# Altium PCB PcbForControlBoard.PcbDoc (part 2 of 2)
Units mm, origin at the board's own origin, x right, y up, seen from the top; angles counter-clockwise.
Board outline 90 x 35 mm, 4 copper layers (Top Layer, MID1, MID2, Bottom Layer), stack 0.603 mm thick; 169 components, 143 nets, 686 pads, 29 vias.
Unrouted connection lines stored in the file: 418.
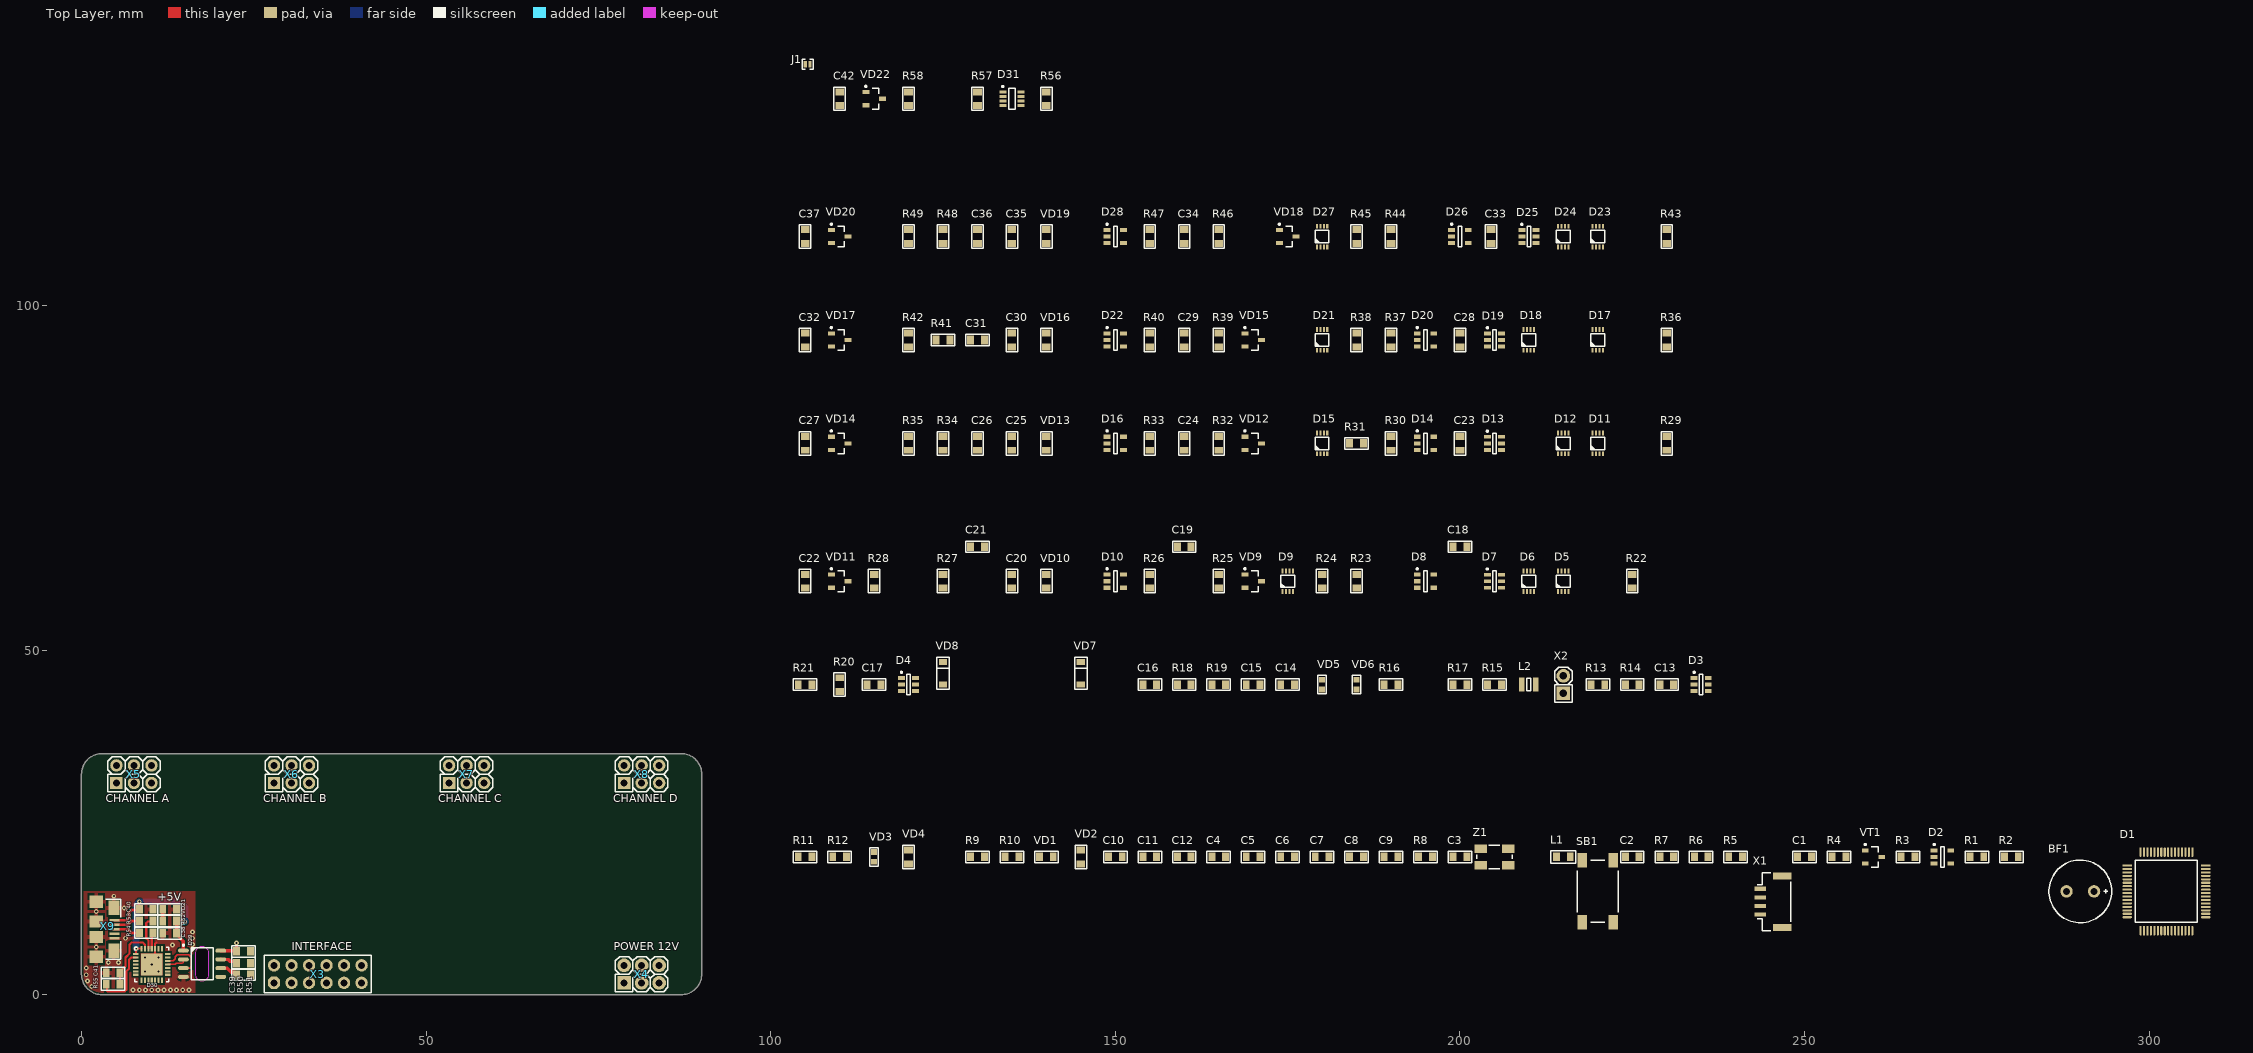
[diagram p0: Top Layer view]

## Via types
v1: diameter 0.7, hole 0.3, Top Layer to Bottom Layer, tented both sides, 29 vias

## Nets (pads, with @x,y where several pads share a name; then routed paths per layer and width w, separated by ;. In a path a pad name is that pad's centre, name@x,y a point inside that pad or via, vN(x,y) a via of type N, cw(c..) or ccw(c..) an arc to the next point about the centre after c; other vN are vias at no path point) (continued)
NetD30_9: (continued)
  Top Layer w0.3: R55.1 3.6,1.375 3.7,1.275 3.7,0.6 3.85,0.45 6.25,0.45 6.5,0.7 6.5,3.4 6.9,3.8 6.9,5.1 7.2,5.4 D30.9
NetD31_1: D31.1 R56.2
NetD31_4: D31.4 R57.2
NetD31_5: D31.5 D31.8 J1.1
NetR3_1: R3.1 R4.1 VT1.1
NetR5_2: R5.2 R7.1 SB1.2
NetR9_1: R9.1 VD1.1
NetR10_1: R10.1 VD2.1
NetR11_1: R11.1 VD3.1
NetR12_1: R12.1 VD4.1
NetR13_2: R13.2 VD5.1
NetR14_1: R14.1 VD6.1
NetR17_2: R17.2 R19.2 X2.2
NetR26_1: R26.1 VD10.1
NetR33_1: R33.1 VD13.1
NetR40_1: R40.1 VD16.1
NetR47_1: R47.1 VD19.1
NetR52_1: R52.1 VD21.1 | length 1.7
  Top Layer w0.5: R52.1 VD21.1
NetR53_1: R53.1 X9.2 | length 3.8
  Top Layer w0.4: X9.2 6.75,10.15 7.3,10.7 R53.1
NetR54_1: R54.1 X9.3 | length 3.8
  Top Layer w0.4: X9.3 6.75,9.5 7.3,8.95 R54.1@8.4,8.95
NetVD8_1: VD8.1 X4.1 X4.2 X4.3
PWM-BUZZER: D1.60 R3.2
RS485-DIR: D1.55 X3.9
STATUS-LED1: D1.62 R9.2
STATUS-LED2: D1.2 R11.2
STATUS-LED3: D1.3 R10.2
STATUS-LED4: D1.4 R12.2
USART1-RX: D1.23 R51.2
USART1-TX: D1.22 R50.2
USART2-RX: D1.57 X3.7
USART2-TX: D1.56 X3.8
USART3-RX: D1.53
USART3-TX: D1.52
USER-BUTTON: C2.2 D1.54 R7.2
VCC3V3: BF1.1 C1.2 C4.2 C5.2 C6.2 C7.2 C10.2 C15.2 C17.2 C18.2 C20.2 C21.2 C23.2 C25.2 C26.2 C28.2 C30.2 C31.2 C33.2 C35.2 C36.2 C39.2 C42.2 D1.1 D1.16 D1.32 D1.48 D1.64 D2.4 D4.5 D5.8 D6.8 D7.5 D8.5 D9.2 D9.7 D9.8 D10.5 D11.8 D12.8 D13.5 D14.5 D15.2 D15.7 D15.8 D16.5 D17.8 D18.8 D19.5 D20.5 D21.2 D21.7 D21.8 D22.5 D23.8 D24.8 D25.5 D26.5 D27.2 D27.7 D27.8 D28.5 D29.8 D31.3 L1.2 L2.1 R1.1 R2.1 R5.1 R6.1 R14.2 R16.2 R25.1 R32.1 R39.1 R46.1 VD9.2 VD11.2 VD12.2 VD14.2 VD15.2 VD17.2 VD18.2 VD20.2 X1.1 X2.1 | length 3.5
  Top Layer w0.5: D29.8 20.219,6.386 22.414,6.386 C39.2 v1(22.5,7.5)
VCC5V-USB: C38.2 C40.2 D29.1 D30.7 D30.8 R52.2 X9.1 | length 29.3
  Top Layer w0.3: D30.8 7.9,6.5 8.1,6.7 D30.7
  Top Layer w0.4: X9.1 6.551,10.8 6.9,11.149 6.9,11.9 7.3,12.3 8.3,12.3 C40.2 v1(8.4,13.5)
  Top Layer w0.5: D29.1 14.8,7.775 13.8,8.775 C38.2 R52.2 13.9,10.6 v1(15,10.6)
  Bottom Layer w1: v1(7.9,6.7) 7.9,13 v1(8.4,13.5) 14.2,13.5 15,12.7 v1(15,10.6)
VIN: C14.2 D3.5 R13.1 R15.1 VD8.2
pads on no net: D1. D2. D3. D4. D5. D6. D7. D8. D9. D10. D10.1 D11. D12. D13. D14. D15. D16. D16.1 D17. D18. D19. D20. D21. D22. D22.1 D23. D24. D25. D26. D27. D28. D28.1 D29.28 D30. D30.1 D30.2 D30.10 D30.11 D30.12 D30.13 D30.14 D30.15 D30.16 D30.17 D30.18 D30.19 D30.20 D30.21 D30.22 D30.23 D30.24 D30.27 D30.28 D31. VD7.4 VD8.4 VD9. VD11. VD12. VD14. VD15. VD17. VD18. VD20. VD22. VT1. X1. X1.0 X9. X9.4 Z1.

## Polygon pours and split planes (outlines as drawn)
no net on Border (none): 16.5,3 ccw(c17.5,3) 18.5,3 18.5,6 ccw(c17.5,6) 16.5,6
GND2 on Top Layer (solid, pour order 0): 0,0 0,15 16.5,15 16.5,0
GND2 on Bottom Layer (solid, pour order 2): 0,0 0,15 16.5,15 16.5,0

## Other copper
Top Layer:
  pour cut-out: 16.5,0 16.5,15 0,15 0,17 18.5,17 18.5,0
MID1:
  pour cut-out: 16.5,0 16.5,15 0,15 0,17 18.5,17 18.5,0
MID2:
  pour cut-out: 16.5,0 16.5,15 0,15 0,17 18.5,17 18.5,0
Bottom Layer:
  pour cut-out: 16.5,0 16.5,15 0,15 0,17 18.5,17 18.5,0

## Silkscreen, mask and mechanical layers (free items; w line width, h text height)
Top Overlay:
  text "CHANNEL A" at 3.5,27.5 h2
  text "CHANNEL B" at 26.36,27.5 h2
  text "CHANNEL C" at 51.76,27.5 h2
  text "CHANNEL D" at 77.16,27.5 h2
  text "+5V" at 11.1,13.225 h2
  text "INTERFACE" at 30.5,6 h2
  text "POWER 12V" at 77.25,6 h2
Top Solder:
  region: 16.5,0 16.5,15 0,15 0,17 18.5,17 18.5,0
Bottom Solder:
  region: 16.5,0 16.5,15 0,15 0,17 18.5,17 18.5,0
Border:
  lines w0.2: 0,3 ccw(c3,3) 3,0 87,0 ccw(c87,3) 90,3 90,32 ccw(c87,32) 87,35 3,35 ccw(c3,32) 0,32 0,3 ; 16.5,3 ccw(c17.5,3) 18.5,3 18.5,6 ccw(c17.5,6) 16.5,6 16.5,3